# Altium PCB STM32.PcbDoc
Units mm, origin at the board's own origin, x right, y up, seen from the top; angles counter-clockwise.
Board outline 37.5 x 37.5 mm, 2 copper layers (Top Layer, Bottom Layer); 45 components, 54 nets, 176 pads, 63 vias.
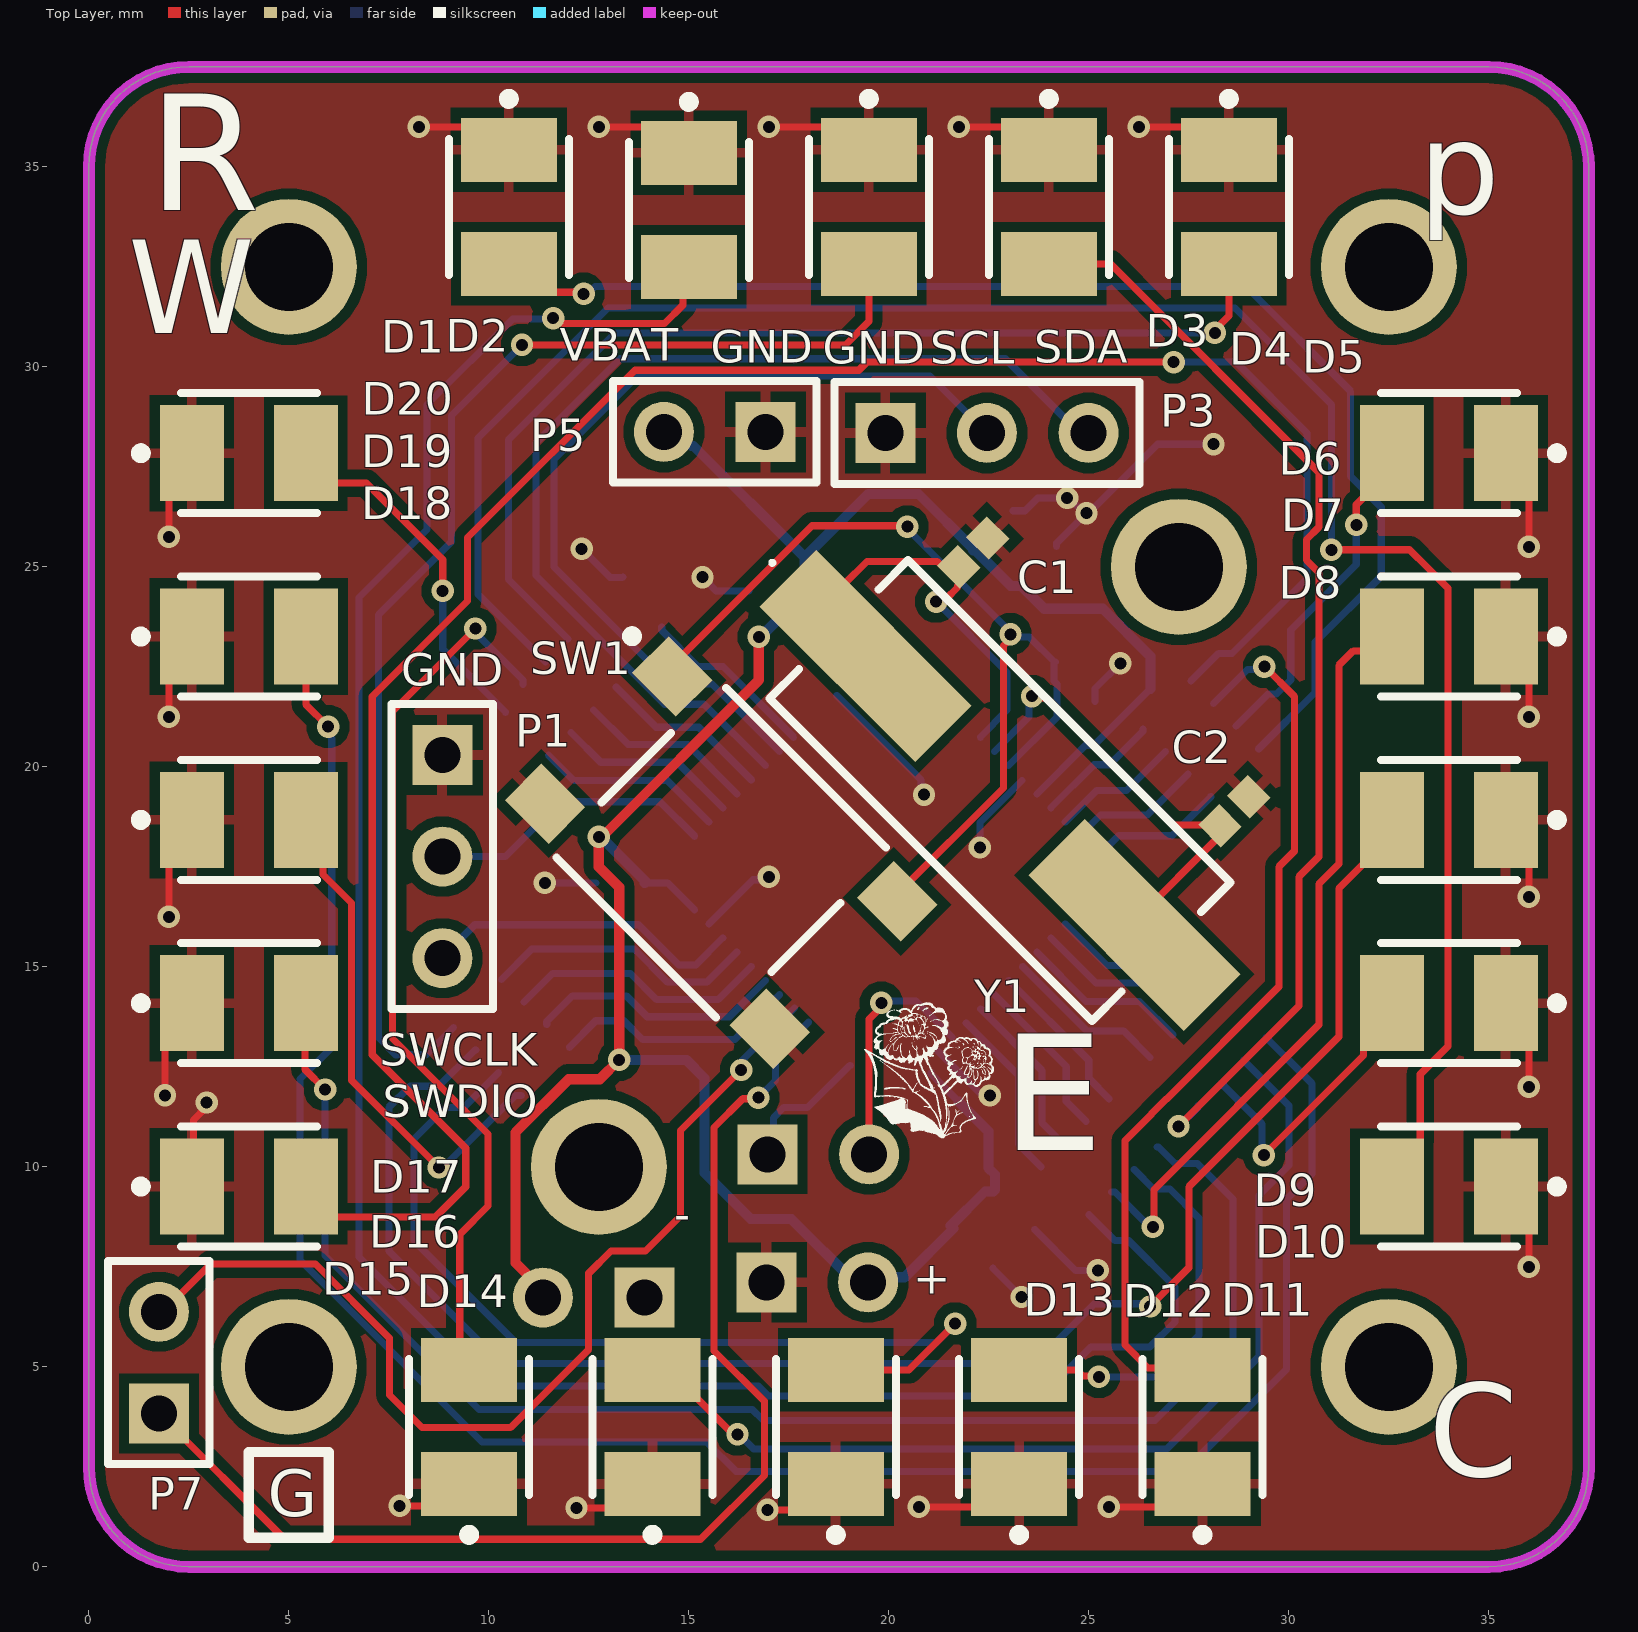
[diagram p0: Top Layer view]
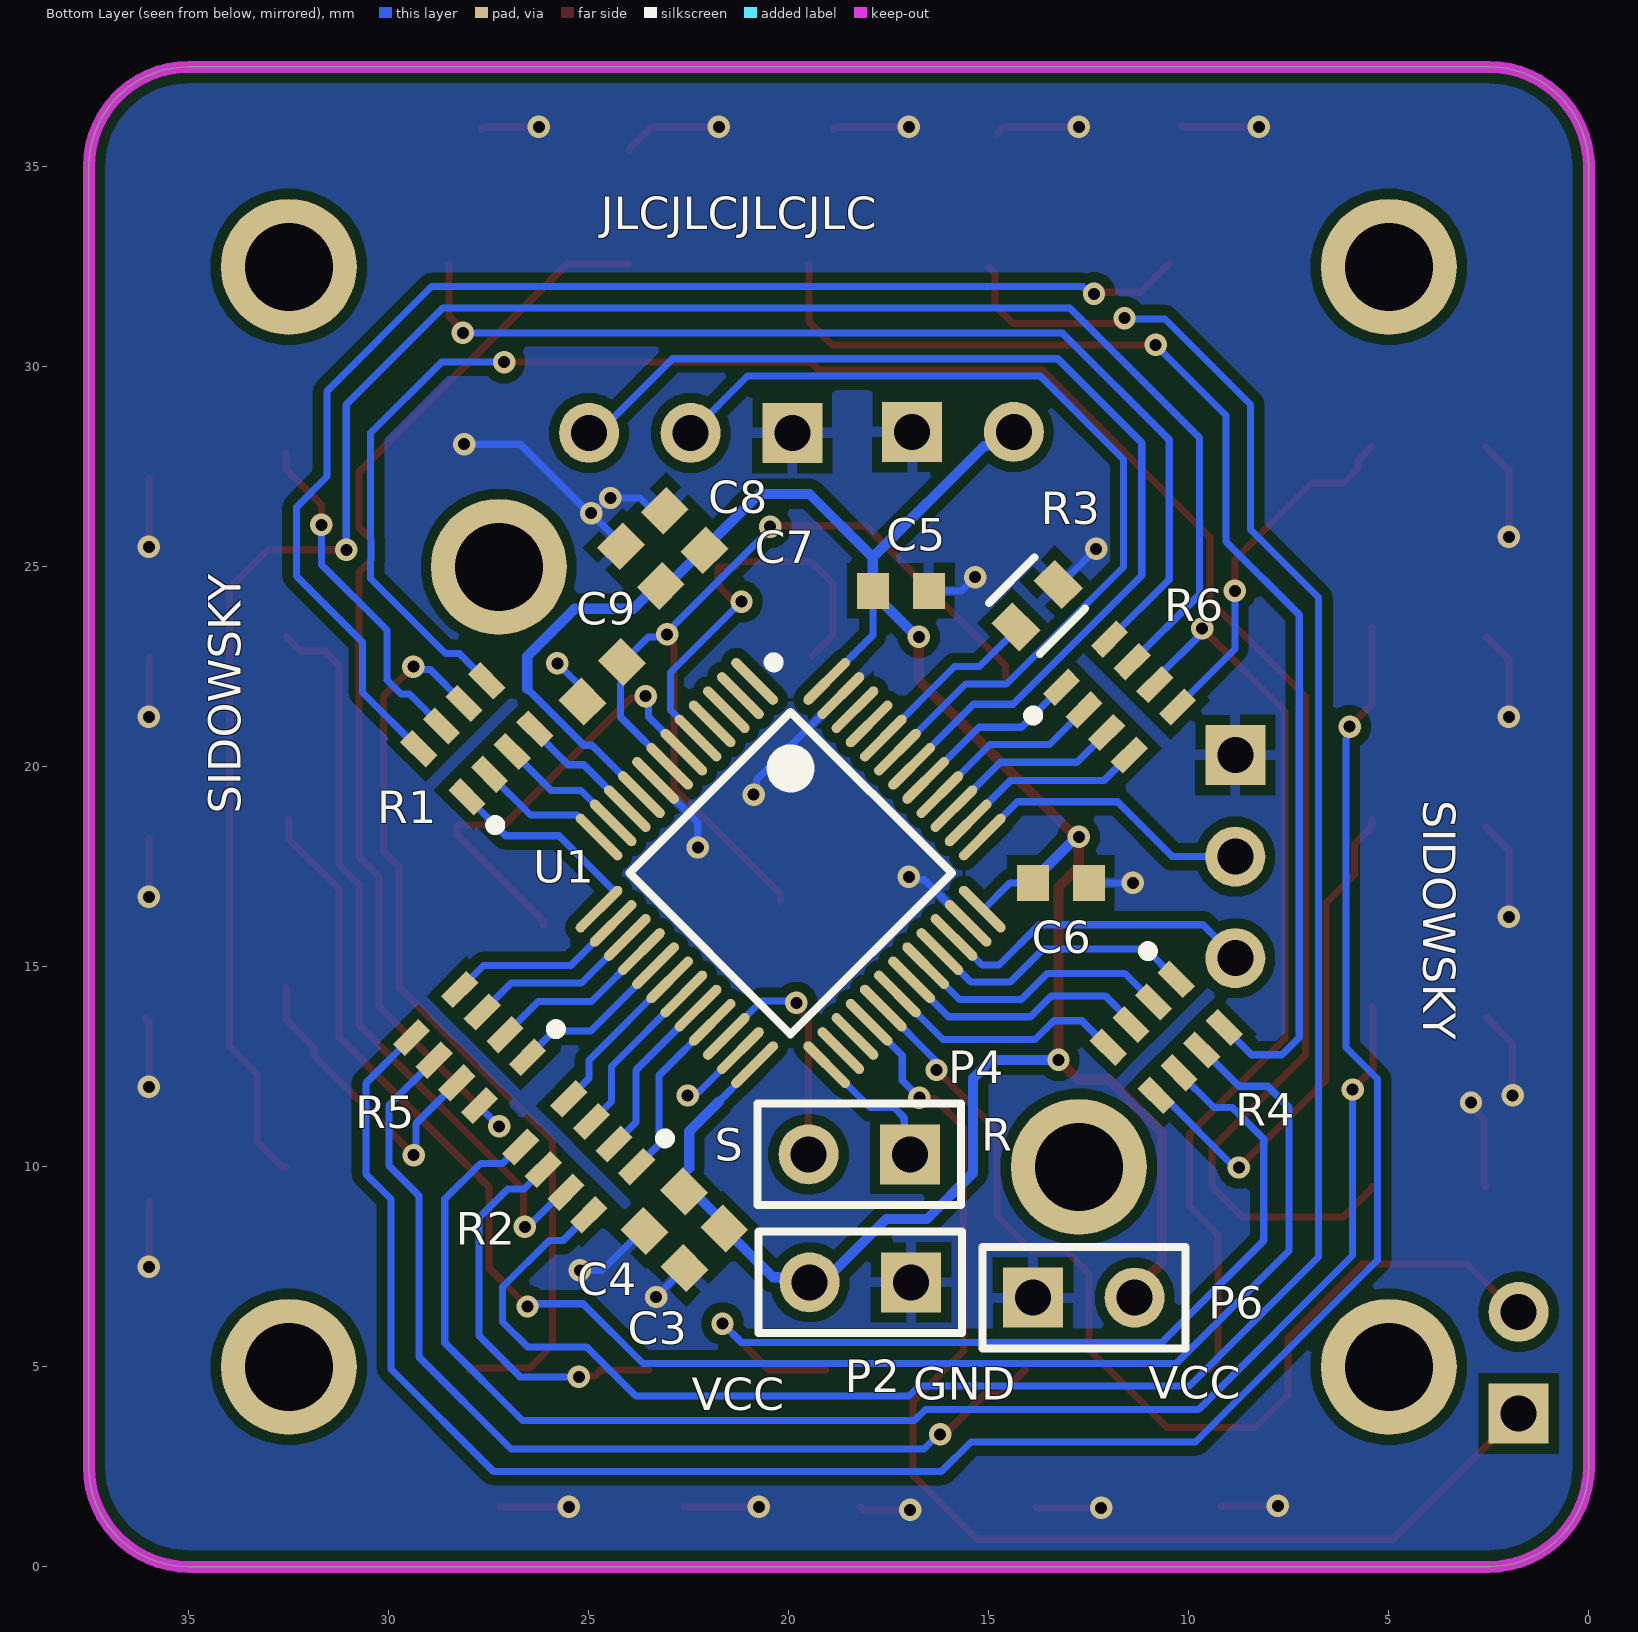
[diagram p1: Bottom Layer view, seen from below]
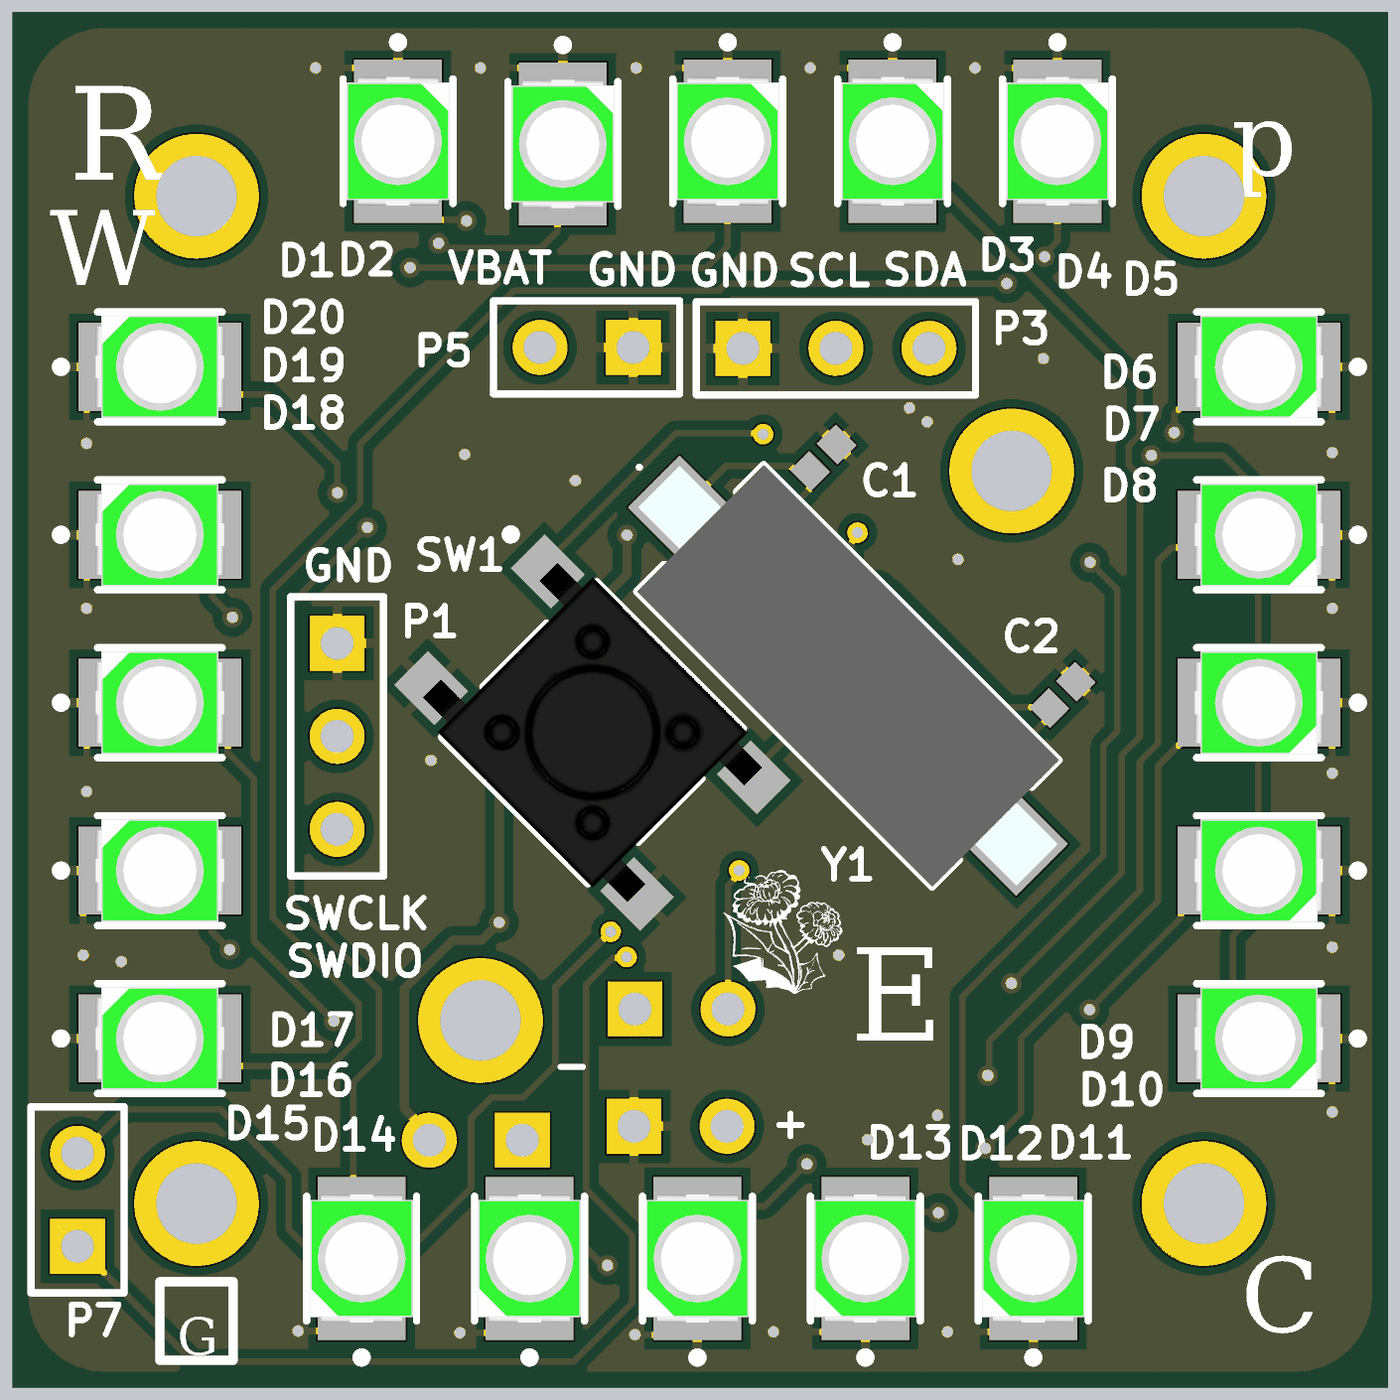
[diagram p2: 3D render of the assembled board from above, using the file's embedded part models]

## Layer stack, top to bottom
Top Solder: solder mask 0.0102, Solder Resist, Dk 3.5
Top Layer: signal copper 0.0356
Dielectric 1: dielectric 0.32, FR-4, Dk 4.8
Bottom Layer: signal copper 0.0356
Bottom Solder: solder mask 0.0102, Solder Resist, Dk 3.5

## Board outline
2.5,0 cw(c2.5,2.5) 0,2.5 0,35 cw(c2.5,35) 2.5,37.5 35,37.5 cw(c35,35) 37.5,35 37.5,2.498 37.5,2.5 cw(c35,2.5) 35,0

## Design rules (kind name [scope] priority, off if disabled: settings)
AcuteAngle [All] p1: minimum=5.80000000000000E+0001 checktracksonly=FALSE
BoardOutlineClearance [All] p1: gap=0.3 ignorepadtopadclearanceinfootprint=FALSE
Clearance [All] p1: gap=0.254 ignorepadtopadclearanceinfootprint=TRUE except(0: Arc-Hole Track-Hole SMDPad-Hole THPad-Hole Via-Hole Fill-Hole Poly-Hole Region-Hole Text-Hole)
Height [All] p1: minheight=0 maxheight=25 prefheight=12.7
HoleToHoleClearance [All] p1: gap=0.254 allowstackedmicrovias=FALSE
MaximumViaCount [All] p1: limit=1000
MinimumAnnularRing [All] p1: minimumring=0.13
MinimumSolderMaskSliver [All] p1: minsoldermaskwidth=0.038
PlaneConnect [All] p1: planeconnectstyle=Direct reliefexpansion=0.508 reliefentries=4 reliefconductorwidth=0.254 reliefairgap=0.254
PolygonConnect [All] p1: thpad.connectstyle=Relief thpad.reliefconductorwidth=0.254 thpad.reliefentries=4 thpad.polygonreliefangle="90 Angle" thpad.airgapwidth=0.254 smdpad.connectstyle=Relief smdpad.reliefconductorwidth=0.254 smdpad.reliefentries=4 smdpad.polygonreliefangle="90 Angle" smdpad.airgapwidth=0.254 via.connectstyle=Direct via.reliefconductorwidth=0.254 via.reliefentries=4 via.polygonreliefangle="90 Angle" via.airgapwidth=0.254
RoutingVias [All] p1: holewidth=0.3 width=0.56 viastyle="Through Hole" minholewidth=0.3 minwidth=0.56 maxholewidth=2.5 maxwidth=2.76
SilkToSilkClearance [All] p1: silktosilkclearance=0.15
SilkToSolderMaskClearance [IsPad] p1: minsilkscreentomaskgap=0.15 clearancetoexposedcopper=TRUE
SolderMaskExpansion [All] p1: expansion=0.05 istentingtop=FALSE useseparateexpansions=TRUE expansionbottom=0.05 istentingbottom=FALSE
UnRoutedNet [All] p1: checkbadconnections=TRUE
Width [All] p1: maxlimit=0.254 minlimit=0.127 preferedwidth=0.2
23 further rules are at their usual default settings.

## Components (designator, comment, footprint, x,y, rotation, side; value= is the part's Value field where it differs from the comment)
C1 "10p 0402" CAPC1006X50X20ML10T10 22.111,25.361 r225 top
C2 "10p 0402" CAPC1006X50X20ML10T10 28.639,18.889 r225 top
C3 "100n" 1608[0603] 22.11,7.963 r135 bottom
C4 "100n" 1608[0603] 23.114,8.89 r135 bottom
C5 "100n" 1608[0603] 17.2,24.4 r0 bottom
C6 "100n" 1608[0603] 13.2,17.1 r0 bottom
C7 "100n" 1608[0603] 23.698,25.019 r225 bottom
C8 "100n" 1608[0603] 22.606,25.908 r225 bottom
C9 "100n" 1608[0603] 24.663,22.123 r135 bottom
D1 "150141BS73100" WL-SMTW_3528 10.5,34 r270 top
D2 "150141BS73100" WL-SMTW_3528 15,33.925 r270 top
D3 "150141BS73100" WL-SMTW_3528 19.5,34 r270 top
D4 "150141BS73100" WL-SMTW_3528 24,34 r270 top
D5 "150141BS73100" WL-SMTW_3528 28.5,34 r270 top
D6 "150141BS73100" WL-SMTW_3528 34,27.84 r180 top
D7 "150141BS73100" WL-SMTW_3528 34,23.257 r180 top
D8 "150141BS73100" WL-SMTW_3528 34,18.673 r180 top
D9 "150141BS73100" WL-SMTW_3528 34,14.09 r180 top
D10 "150141BS73100" WL-SMTW_3528 34,9.507 r180 top
D11 "150141BS73100" WL-SMTW_3528 27.84,3.5 r90 top
D12 "150141BS73100" WL-SMTW_3528 23.257,3.5 r90 top
D13 "150141BS73100" WL-SMTW_3528 18.673,3.5 r90 top
D14 "150141BS73100" WL-SMTW_3528 14.09,3.5 r90 top
D15 "150141BS73100" WL-SMTW_3528 9.507,3.5 r90 top
D16 "150141BS73100" WL-SMTW_3528 4,9.507 r0 top
D17 "150141BS73100" WL-SMTW_3528 4,14.09 r0 top
D18 "150141BS73100" WL-SMTW_3528 4,18.673 r0 top
D19 "150141BS73100" WL-SMTW_3528 4,23.257 r0 top
D20 "150141BS73100" WL-SMTW_3528 4,27.84 r0 top
P1 "Programing" HDR1X3 8.839,20.295 r270 top
P2 "Power" HDR1X2 16.942,7.112 r0 bottom
P3 "I2C" HDR1X3 19.914,28.346 r0 top
P4 "SYN/RDY" HDR1X2 16.967,10.312 r0 bottom
P5 "Power" HDR1X2 16.916,28.372 r180 top
P6 "Power" HDR1X2 13.894,6.731 r180 bottom
P7 "BQ" HDR1X2 1.753,3.835 r90 top
R1 "120R1206" BOUR-CAY16-J4_V 27.8,20.7 r45 bottom
R2 "33R 3.3V diody" BOUR-CAY16-J4_V 25.253,10.25 r315 bottom
R3 "10k" FP-CRCW0603-e3-MFG 13.792,24.028 r135 bottom
R4 "47R" BOUR-CAY16-J4_V 10.564,13.237 r225 bottom
R5 "68R" BOUR-CAY16-J4_V 27.982,12.984 r315 bottom
R6 "100R" BOUR-CAY16-J4_V 11.735,21.742 r135 bottom
SW1 "PTS645SM43SMTR92LFS" FP-PTS645SM43SMTR92LFS-MFG 15.806,17.856 r315 top
U1 "STM32F103C6T6A" STM-LQFP48_L 19.955,17.344 r225 bottom
Y1 "LF_XTAL003166" LFXTAL003166 22.78,19.408 r315 top

## Footprints (in the part's own frame and the unit in brackets; to place one, negate y for a bottom-side part, rotate by r counter-clockwise, add the part's x,y. Pads: shape width x height; smd on the part's side, far side on the other; paste and mask are expansions set on the pad)
1608[0603] [mm] "Chip Capacitor, Body 1.6x0.8mm, IPC High Density"
  rect 0.8x0.9 smd: 1(-0.7,0) 2(0.7,0)
  body extent -0.87,-0.48 0.87,0.47, height 1.3
BOUR-CAY16-J4_V [mm] "SMD, 8-Leads, Body 1.6x3.2mm, Pitch 0.8mm"
  rect 0.9x0.425 smd: 1(-0.85,1.2) 2(-0.85,0.4) 3(-0.85,-0.4) 4(-0.85,-1.2) 5(0.85,-1.2) 6(0.85,-0.4) 7(0.85,0.4) 8(0.85,1.2)
  silkscreen extent -1.97,1.08 -1.73,1.32, body extent -0.8,-1.6 0.8,1.6, height 0.6
CAPC1006X50X20ML10T10 [mm] "Chip Capacitor, 2-Leads, Body 1.00x0.55mm, IPC Low Density"
  rect 0.74x0.8 smd: 1(-0.51,0) 2(0.51,0)
  body extent -0.55,-0.33 0.55,0.32, height 0.5
FP-CRCW0603-e3-MFG [mm]
  rect 0.75x1 smd paste+0 mask+0: 1(-0.75,0) 2(0.75,0)
  silkscreen extent -0.8,-0.9 0.8,0.9, body extent -0.77,-0.42 0.77,0.42, height 0.5
FP-PTS645SM43SMTR92LFS-MFG [mm]
  rect 1.55x1.3 smd paste+0 mask+0: 1(-3.975,2.25) 2(3.975,2.25) 3(-3.975,-2.25) 4(3.975,-2.25)
  silkscreen extent -5.52,-3 3,3, body extent -4.85,-3.1 4.85,3.1, height 0.25
HDR1X2 [mm] "Connector; Header; 2 Position"
  rect 1.5x1.5 hole 0.9: 1(0,0)
  round 1.5 hole 0.9: 2(2.54,0)
  silkscreen extent -1.27,-1.27 3.81,1.27
HDR1X3 [mm]
  rect 1.5x1.5 hole 0.9: 1(0,0)
  round 1.5 hole 0.9: 2(2.54,0) 3(5.08,0)
  silkscreen extent -1.27,-1.27 6.35,1.27
LFXTAL003166 [mm]
  rect 5.5x2 smd: 1(-4.75,0) 2(4.75,0)
  silkscreen extent -8.1,-2.45 5.7,2.45, body extent -7.3,-2.45 7.3,2.45, height 4.4
STM-LQFP48_L [mm] "QFP, 48-Leads, Body 7x7mm, Pitch 0.5mm, IPC High Density"
  oval 1.55x0.25 smd: 1(-4.025,2.75) 2(-4.025,2.25) 3(-4.025,1.75) 4(-4.025,1.25) 5(-4.025,0.75) 6(-4.025,0.25) 7(-4.025,-0.25) 8(-4.025,-0.75) 9(-4.025,-1.25) 10(-4.025,-1.75) 11(-4.025,-2.25) 12(-4.025,-2.75) 25(4.025,-2.75) 26(4.025,-2.25) 27(4.025,-1.75) 28(4.025,-1.25) 29(4.025,-0.75) 30(4.025,-0.25) 31(4.025,0.25) 32(4.025,0.75) 33(4.025,1.25) 34(4.025,1.75) 35(4.025,2.25) 36(4.025,2.75)
  oval 0.25x1.55 smd: 13(-2.75,-4.025) 14(-2.25,-4.025) 15(-1.75,-4.025) 16(-1.25,-4.025) 17(-0.75,-4.025) 18(-0.25,-4.025) 19(0.25,-4.025) 20(0.75,-4.025) 21(1.25,-4.025) 22(1.75,-4.025) 23(2.25,-4.025) 24(2.75,-4.025) 37(2.75,4.025) 38(2.25,4.025) 39(1.75,4.025) 40(1.25,4.025) 41(0.75,4.025) 42(0.25,4.025) 43(-0.25,4.025) 44(-0.75,4.025) 45(-1.25,4.025) 46(-1.75,4.025) 47(-2.25,4.025) 48(-2.75,4.025)
  silkscreen extent -4.15,-2.85 2.85,3.55, body extent -3.5,-3.5 3.5,3.5, height 1.6
WL-SMTW_3528 [mm] "SMD Mono-color TOP LED, body 3.2x2.8mm"
  rect 1.6x2.4 smd: 1(-1.425,0) 2(1.425,0)
  silkscreen extent -2.82,-1.5 1.7,1.5, body extent -1.75,-1.4 1.75,1.4, height 1.9

## Part data
C1 C2: library part CMP-2008-04829-1, Manufacturer="AVX Interconnect / Elco", Part Number=0402YJ100FBSTR
C3 C4 C5 C6 C7 C8 C9: library part "Cap Semi", "Capacitor (Semiconductor SIM Model)", LatestRevisionDate=29-May-2009, LatestRevisionNote="IPC-7351 Footprint Added.", PackageDescription="Chip Capacitor", PackageReference=C1206, Published=8-Jun-2000, Publisher="Altium Limited"
D1 D2 D3 D4 D5 D6 D7 D8 D9 D10 D11 D12 D13 D14 D15 D16 D17 D18 D19 D20: library part CMP-1429-00005-2, Case Code (Imperial)=1411, Case Code (Metric)=3528, Color=Blue, Forward Current=100mA, Forward Voltage=3.2V, Max Operating Temperature=85°C, Max Reverse Voltage (DC)=5V, Min Operating Temperature=-40°C, Test Current=20mA, Case/Package=3528, Dominant Wavelength=470nm, Height=1.9mm, Length=3.5mm, Lens Style="Clear, Round", Luminous Intensity=270mcd, Mount="Surface Mount", NexarPartId=29717793, Packaging="Tape and Reel", Peak Wavelength=465nm, REACH SVHC=Unknown, RoHS=Compliant, Viewing Angle=120°, Wavelength=470nm, Width=2.8mm
P1 P3: library part "Header 3", "Header, 3-Pin", LatestRevisionDate=17-Jul-2002, LatestRevisionNote="Re-released for DXP Platform.", Publisher="Altium Limited"
P2 P4 P5 P6 P7: library part "Header 2", "Header, 2-Pin", LatestRevisionDate=17-Jul-2002, LatestRevisionNote="Re-released for DXP Platform.", Publisher="Altium Limited"
R1 R2 R4 R5 R6: library part CMP-1747-00007-1, "Chip Resistor Array, 1 KOhm, +/- 5%, 62.5 mW, -55 to 125 degC, 8-Pin SMD, RoHS, Tape and Reel", Case Code (Imperial)=0603, Case Code (Metric)=1608, Max Operating Temperature="155 degC", Min Operating Temperature="-55 degC", Package Quantity=5000, Power Rating="100 mW", Resistance="330 Ohm", Tolerance=1%, Voltage Rating="50 V", Case\Package=0603, ComponentLink1Description="Manufacturer URL", ComponentLink1URL=http://www.bourns.com/, ComponentLink2Description=Datasheet, ComponentLink2URL=http://www.bourns.com/pdfs/CATCAY.pdf, DatasheetVersion=Sep-14, Height="0.45 mm", Length="1.6 mm", Mount="Surface Mount", PackageDescription="8-Pin Surface Mount Device, Body 1.6 x 3.2 mm, Pitch 0.8 mm", PackageReference=CAY16-J4, Packaging="Tape and Reel", Pins=2, REACH SVHC="No SVHC", RoHSCompliant=true, Voltage Rating (DC)="50 V", Width="0.8 mm"
R3: library part CMP-2000-03525-2, "RES Thick Film, 10kΩ, 1%, 0.1W, 100ppm/°C, 0603", Case Code (Imperial)=0603, Case Code (Metric)=1608, Max Operating Temperature=155°C, Max Power Dissipation=100mW, Min Operating Temperature=-55°C, Package Quantity=10, Resistance=66.5kR, Temperature Coefficient=100ppm/°C, Tolerance=1%, Voltage Rating=75V, Case/Package=0603, Composition="Thick Film", Contact Plating=Tin, Depth=0.85mm, Features="Automotive AEC-Q200", Height=0.45mm, Length=1.55mm, Military Standard=Not, Number of Pins=2, Number of Terminations=2, Packaging="Tape and Reel", Power Rating=100mW, Radiation Hardening=No, Termination=SMD/SMT, Weight=7.1E-05oz, Width=0.85mm, Working Voltage=75V
SW1: library part CMP-2000-05160-2, "SWITCH TACTILE SPST-NO 0.05A 12V", Case/Package=SMD/SMT, Color=Black, Contact Resistance=100mR, Current Rating=50mA, Max Operating Temperature=60°C, Max Voltage Rating (DC)=12V, Min Operating Temperature=-20°C, Operating Force=160gf, Package Quantity=1, Actuator Length=0.85mm, Actuator Material=Nylon, Actuator Type=Standard, Contact Material=Silver, Contact Plating=Silver, Depth=9mm, Illumination Type=Non-Illuminated, Lead Free="Lead Free", Length=6mm, Max Current Rating=50mA, Mechanical Life=100000Cycles, Mount="Surface Mount", Orientation=Straight, Packaging="Tape and Reel", REACH SVHC="No SVHC", Switch Function=Off-Mom, Termination="Gull Wing", Throw Configuration=SPST, Voltage Rating (DC)=12V
U1: library part CMP-0237-00254-3, "ARM Cortex-M3 32-bit MCU, 32 KB Flash, 10 KB Internal RAM, 37 I/Os, 48-pin LQFP, -40 to 85 degC, Tray", I/Os (High Current)=37, Operating Frequency(F) (Processor speed) (MHz)=72, Supply Voltage(Vcc) min (V)=2, A/D Converter="2x12-bit (10 Channel)", ComponentLink1Description="Manufacturer URL", ComponentLink1URL=http://www.st.com/web/en/home.html, ComponentLink2Description=Datasheet, ComponentLink2URL=http://www.st.com/st-web-ui/static/active/en/resource/technical/document/datasheet/CD00210843.pdf, ComponentLink3Description="Package Specification", ComponentLink3URL=http://www.st.com/st-web-ui/static/active/en/resource/technical/document/datasheet/DM00058181.pdf, Core="ARM Cortex-M3", DatasheetVersion="Rev. 6", FLASH Size (Prog) (kB)=32, Internal RAM Size (kB)=10, Mounting Technology="Surface Mount", PackageDescription="48-Pin Low Profile Quad Flat Package, 7 x 7 mm Body, 0.5 mm Pitch", PackageReference=LQFP48, PackageVersion="Rev. 6, 06/2013", Packing=Tray, PartNumber=STM32F103C6T6A
Y1: "Crystal or Oscillator", Manufacturer_Name=IQD, Manufacturer_Part_Number="LF XTAL003166", Datasheet Link=https://www.tme.eu/Document/8dce48f98215dcf997cc1ef25822beeb/LFXTAL003166.pdf, Height=4.3mm

## Free pads (board coordinates)
  round 3.4 hole 2.2: 0(5,5) 0(5,32.5) 0(12.75,10) 0(27.25,25) 0(32.5,5) 0(32.5,32.5)

## Via types
v1: diameter 0.56, hole 0.3, Top Layer to Bottom Layer, tented both sides, 58 vias
v2: diameter 0.56, hole 0.3, Top Layer to Bottom Layer, 5 vias

## Nets (pads, with @x,y where several pads share a name; then routed paths per layer and width w, separated by ;. In a path a pad name is that pad's centre, name@x,y a point inside that pad or via, vN(x,y) a via of type N, cw(c..) or ccw(c..) an arc to the next point about the centre after c; other vN are vias at no path point)
D1: R1.1 U1.13 | length 5.3
  Bottom Layer w0.178: U1.13@24.763,16.424 24.367,16.82 24.367,16.9 25.744,18.277 27.077,18.277 28.047,19.247 R1.1
D1N: D1.2 R1.8 | length 33
  Top Layer w0.178: D1.2 11.211,31.864 12.332,31.864 v1(12.37,31.826)
  Bottom Layer w0.178: v1(12.37,31.826) 12.473,31.826 12.651,32.004 12.863,32.004 28.931,32.004 31.547,29.388 31.547,27.254 32.31,26.491 32.31,24.766 30.658,23.114 30.658,21.861 R1.8
D2: R2.1 U1.21 | length 4.4
  Bottom Layer w0.178: U1.21@21.934,13.596 23.241,12.29 23.241,10.565 R2.1
D2N: D2.2 R2.8 | length 56.9
  Top Layer w0.178: v1(11.608,31.217) 11.711,31.217 11.845,31.083 14.395,31.083 14.85,31.537 14.85,32.35 D2.2
  Bottom Layer w0.178: v1(11.608,31.217) 11.589,31.198 10.598,31.198 8.458,29.058 8.458,25.933 6.756,24.232 6.756,7.747 9.982,4.521 16.739,4.521 16.993,4.267 23.825,4.267 25.058,5.5 26.531,5.5 27.155,6.124 27.155,6.997 25.998,8.153 25.652,8.153 R2.8
D3: R4.1 U1.33 | length 6.9
  Bottom Layer w0.178: R4.1 11.072,15.443 13.64,15.443 14.467,14.616 15.449,14.616 16.197,15.364 U1.33@16.207,15.364
D3N: D3.2 R4.8 | length 31.5
  Top Layer w0.178: v1(10.829,30.548) 18.914,30.548 19.5,31.133 D3.2
  Bottom Layer w0.178: R4.8 8.431,12.802 7.671,12.802 7.239,13.233 7.239,23.8 9.068,25.629 9.068,28.786 v1(10.829,30.548)
D4: R5.1 U1.17 | length 4.1
  Bottom Layer w0.178: U1.17@23.349,15.01 23.349,15 24.949,13.4 25.869,13.4 R5.1
D4N: D4.2 R5.8 | length 27.7
  Top Layer w0.178: D4.2 25.54,32.575 30.75,27.365 30.75,25.991 30.441,25.682 30.441,25.166 30.75,24.857 30.75,17.75 30.25,17.25 30.25,14.019 v1(27.243,11.013)
  Bottom Layer w0.178: v1(27.243,11.013) 27.734,11.504 R5.8
D5: R6.1 U1.41 | length 4.3
  Bottom Layer w0.178: R6.1 14.186,20.988 15.249,20.988 U1.41@16.56,19.677
D5N: D5.2 R6.8 | length 26.2
  Top Layer w0.178: v1(28.148,30.848) 28.148,30.918 28.5,31.269 D5.2
  Bottom Layer w0.178: R6.8 10.49,24.684 10.49,28.176 13.162,30.848 v1(28.148,30.848)
D6: R1.2 U1.12 | length 3.4
  Bottom Layer w0.178: U1.12@24.763,18.263 25.296,18.796 26.462,18.796 R1.2
D6N: D6.2 R1.7 | length 8.6
  Top Layer w0.178: v1(31.687,26.048) 31.686,26.049 31.686,26.551 32.575,27.44 D6.2
  Bottom Layer w0.178: R1.7 29.484,21.819 29.693,21.819 30.048,22.174 30.048,23.419 31.687,25.058 v1(31.687,26.048)
D7: R2.2 U1.20 | length 4.2
  Bottom Layer w0.178: U1.20@22.288,13.95 23.825,12.412 23.825,11.112 R2.2
D7N: D7.2 R2.7 | length 19
  Top Layer w0.178: v1(26.6,8.5) 26.634,8.534 26.634,9.435 30.75,13.551 30.75,17.069 31.25,17.569 31.25,22.538 31.612,22.9 32.219,22.9 D7.2
  Bottom Layer w0.178: R2.7 25.652,9.367 26.519,8.5 v1(26.6,8.5)
D8: R4.2 U1.32 | length 6.6
  Bottom Layer w0.178: R4.2 11.594,14.834 13.538,14.834 14.188,14.184 15.734,14.184 U1.32@16.56,15.01
D8N: D8.2 R4.7 | length 41.9
  Top Layer w0.178: v1(26.532,6.508) 27.5,7.477 27.5,9.5 31.25,13.25 31.25,16.958 31.854,17.562 31.864,17.562 32.5,18.198 D8.2@32.5,18.7
  Bottom Layer w0.178: R4.7 9.651,12.919 8.746,12.014 8.026,12.014 7.5,11.488 7.5,7.892 10.312,5.08 23.647,5.08 25.145,6.578 26.462,6.578 v1(26.532,6.508)
D9: R5.2 U1.16 | length 4.2
  Bottom Layer w0.178: U1.16@23.702,15.364 24.932,14.134 26.266,14.134 R5.2
D9N: D9.2 R5.7 | length 7.8
  Top Layer w0.178: v1(29.377,10.294) 31.864,12.78 31.864,12.979 32.575,13.69 D9.2@32.575,14.5
  Bottom Layer w0.178: R5.7 29.325,11.075 29.325,10.346 v1(29.377,10.294)
D10: R6.2 U1.40 | length 4.5
  Bottom Layer w0.178: R6.2 13.486,20.557 14.974,20.557 U1.40@16.207,19.324
D10N: D10.2 R6.7 | length 52
  Top Layer w0.178: v1(31.064,25.424) 31.066,25.425 33.02,25.425 33.477,24.968 33.982,24.463 33.982,13.013 33.286,12.316 33.286,10.618 32.668,10 D10.2@32.575,10
  Bottom Layer w0.178: R6.7 9.728,24.315 9.728,28.222 12.977,31.471 28.651,31.471 31.064,29.058 v1(31.064,25.424)
D11: R1.3 U1.11 | length 3.2
  Bottom Layer w0.178: U1.11@24.409,18.616 25.198,19.406 25.94,19.406 R1.3
D11N: D11.2 R1.6 | length 23
  Top Layer w0.178: D11.2@28,4.925 27.952,4.973 26.478,4.973 25.909,5.542 25.909,10.659 26.564,11.314 26.564,11.326 26.929,11.691 26.941,11.691 29.75,14.5 29.75,17.5 30.137,17.887 30.137,21.763 29.396,22.504 v1(29.388,22.504)
  Bottom Layer w0.178: R1.6 28.966,22.431 29.315,22.431 v1(29.388,22.504)
D12: R2.3 U1.19 | length 4.1
  Bottom Layer w0.178: U1.19@22.642,14.303 24.435,12.51 24.435,11.634 R2.3
D12N: D12.2 R2.6 | length 9.8
  Top Layer w0.178: D12.2@23.5,4.925 24.691,4.925 24.849,4.767 25.233,4.767 v1(25.25,4.75)
  Bottom Layer w0.178: v1(25.25,4.75) 26.721,4.75 27.75,5.779 27.75,8.724 27.026,9.449 26.62,9.449 R2.6
D13: R4.3 U1.31 | length 6.4
  Bottom Layer w0.178: R4.3 11.447,13.632 12.09,14.275 13.437,14.275 13.959,13.752 16.01,13.752 U1.31@16.914,14.657
D13N: D13.2 R4.6 | length 23.2
  Top Layer w0.178: D13.2@19.073,4.925 20.503,4.925 v1(21.659,6.081)
  Bottom Layer w0.178: R4.6 9.373,11.481 8.915,11.481 8.128,10.693 8.128,8.153 10.669,5.613 21.19,5.613 v1(21.659,6.081)
D14: R5.3 U1.15 | length 4.4
  Bottom Layer w0.178: U1.15@24.056,15.717 25.179,14.594 26.937,14.594 R5.3
D14N: D14.2 R5.6 | length 25.1
  Top Layer w0.178: D14.2 14.715,4.301 15.115,4.301 16.028,3.387 16.144,3.387 v1(16.217,3.314)
  Bottom Layer w0.178: v1(16.217,3.314) 16.255,3.314 16.622,2.946 26.946,2.946 29.25,5.25 29.25,9.286 30,10.036 30,11.531 R5.6
D15: R6.3 U1.39 | length 4.6
  Bottom Layer w0.178: R6.3 12.799,20.113 14.71,20.113 U1.39@15.853,18.97
D15N: D15.2 R6.6 | length 22.7
  Top Layer w0.178: D15.2 9.274,5.157 9.274,8.309 9.982,9.017 9.982,10.82 7.595,13.208 7.595,21.387 v1(9.665,23.457)
  Bottom Layer w0.178: v1(9.665,23.457) 9.665,23.353 10.851,22.167 R6.6
D16: R1.4 U1.10 | length 3.2
  Bottom Layer w0.178: U1.10@24.056,18.97 24.056,18.98 25.128,20.052 25.518,20.052 26.35,20.884 R1.4
D16N: D16.2 R1.5 | length 54
  Top Layer w0.178: D16.2 5.425,9.461 6.136,8.75 8.674,8.75 9.423,9.5 9.423,10.465 7.087,12.802 7.087,21.76 9.47,24.143 9.47,25.73 13.656,29.916 19.248,29.916 19.448,30.116 v1(27.119,30.116)
  Bottom Layer w0.178: v1(27.119,30.116) 28.685,30.116 30.455,28.346 30.455,25.695 30.441,25.682 30.441,25.166 30.455,25.153 30.455,24.706 28.583,22.835 28.238,22.835 R1.5
D17: R2.4 U1.18 | length 4
  Bottom Layer w0.178: U1.18@22.995,14.657 23.005,14.657 24.998,12.664 24.998,12.213 25.5,11.711 R2.4
D17N: D17.2 R2.5 | length 37.7
  Top Layer w0.178: D17.2@5.425,14 5.4,13.975 5.4,12.44 v1(5.906,11.934)
  Bottom Layer w0.178: v1(5.906,11.934) 5.906,7.785 9.754,3.937 16.586,3.937 16.866,3.658 26.658,3.658 28.6,5.6 28.6,9.195 27.711,10.084 27.154,10.084 26.74,10.498 R2.5
D18: R4.4 U1.30 | length 6.2
  Bottom Layer w0.178: R4.4 12.675,13.651 13.373,13.651 13.842,13.183 16.147,13.183 U1.30@17.268,14.303
D18N: D18.2 R4.5 | length 12.9
  Top Layer w0.178: D18.2 5.425,18.5 5.854,18.071 5.854,17.311 6.568,16.597 6.568,12.165 v1(8.751,9.982)
  Bottom Layer w0.178: v1(8.751,9.982) 8.854,9.982 10.66,11.788 R4.5
D19: R5.4 U1.14 | length 4.5
  Bottom Layer w0.178: U1.14@24.409,16.071 25.451,15.029 27.633,15.029 R5.4
D19N: D19.2 R5.5 | length 53.4
  Top Layer w0.178: D19.2@5.425,23.5 5.425,21.562 v1(5.981,21.006)
  Bottom Layer w0.178: v1(5.981,21.006) 6.054,20.933 6.054,20.728 6.072,20.711 6.072,12.981 5.283,12.192 5.283,7.671 9.83,3.124 15.443,3.124 16.18,2.388 27.388,2.388 29.947,4.947 29.947,9.195 30.575,9.823 30.575,12.088 R5.5
D20: R6.4 U1.38 | length 4.7
  Bottom Layer w0.178: R6.4 12.127,19.653 14.463,19.653 U1.38@15.5,18.616
D20N: D20.2 R6.5 | length 9.2
  Top Layer w0.178: D20.2@5.425,28 5.772,27.653 5.772,27.456 6.136,27.093 6.936,27.093 8.847,25.182 v1(8.847,24.401)
  Bottom Layer w0.178: v1(8.847,24.401) 8.847,22.943 10.42,21.371 R6.5@10.42,21.361
GND: C1.1 C2.1 C3.1 C4.1 C5.1 C6.1 C7.1 C8.1 C9.1 D1.1 D2.1 D3.1 D4.1 D5.1 D6.1 D7.1 D8.1 D9.1 D10.1 D11.1 D12.1 D13.1 D14.1 D15.1 D16.1 D17.1 D18.1 D19.1 D20.1 P1.1 P2.1 P3.1 P5.1 P6.1 R3.2 SW1.3 SW1.4 U1.8 U1.23 U1.35 U1.47 | length 62.2
  Top Layer w0.178: v1(1.905,11.786) 1.905,13.08 D17.1@2.575,13.75 ; v1(2,16.25) 2,17.925 D18.1@2.575,18.5 ; v1(2,21.25) 2,22.675 D19.1@2.575,23.25 ; v1(2,25.75) 2,27.425 D20.1@2.575,28 ; D16.1 2.616,9.548 2.616,11.174 2.946,11.504 v1(2.946,11.608) ; v1(7.772,1.524) D15.1@9.201,1.524 ; v1(8.25,36) 10.153,36 D1.1@10.189,36.036 ; v1(12.192,1.473) 13.798,1.473 D14.1@13.825,1.5 ; v1(12.75,36) 14.625,36 D2.1@14.789,35.836 ; v1(16.967,1.422) 18.147,1.422 D13.1@18.225,1.5 ; v1(17,36) 18.825,36 D3.1@18.889,35.936 ; v1(20.75,1.5) D12.1@22.625,1.5 ; v1(21.75,36) 23.425,36 D4.1 ; v1(25.5,1.5) D11.1@27.225,1.5 ; v1(26.25,36) 27.625,36 D5.1@27.689,35.936 ; v1(36,7.5) D10.1@36,9.125 ; v1(36,12) 36,13.625 D9.1@36.1,13.725 ; v1(36,16.75) D8.1@36,18.225 ; v1(36,21.25) D7.1@36,22.725 ; v1(36,25.5) D6.1@36,27.225
  Bottom Layer w0.178: v1(11.4,17.1) C6.1@12.68,17.1 ; v1(12.319,25.451) 13.034,24.736 13.34,24.736 R3.2@13.35,24.746 ; v1(15.342,24.74) 15.681,24.4 C5.1 ; U1.35@15.5,16.071 16.606,17.177 16.927,17.177 v1(17,17.25) ; U1.47 20.806,19.675 20.806,19.377 v1(20.879,19.304) ; U1.23@21.227,12.889 22.26,11.856 22.454,11.856 v1(22.528,11.783) ; v1(22.276,17.983) 22.276,18.604 U1.8 ; C3.1 22.605,7.458 v1(23.317,6.746) ; C8.1 23.403,26.403 23.721,26.721 v1(24.46,26.721) 24.511,26.721 24.892,26.34 v1(24.943,26.34) ; C4.1@23.644,8.43 23.648,8.43 24.669,7.409 v1(25.226,7.409) ; C7.1 24.193,25.59 v1(24.943,26.34) ; C9.1 25.158,21.958 v1(25.786,22.586) ; v1(28.116,28.065) 26.715,28.065 24.99,26.34 v1(24.943,26.34)
I2C_SCL: P3.2 U1.43 | length 22.5
  Bottom Layer w0.178: U1.43@17.268,20.384 15.579,22.073 14.556,22.073 11.633,24.995 11.633,27.687 13.715,29.769 21.031,29.769 P3.2
I2C_SDA: P3.3 U1.42 | length 26.5
  Bottom Layer w0.178: U1.42@16.914,20.031 15.38,21.565 14.395,21.565 11.176,24.784 11.176,28.1 13.277,30.201 22.911,30.201 24.822,28.289 24.879,28.346 P3.3
NetC1_2: C1.2 U1.5 Y1.1 | length 10.8
  Top Layer w0.178: Y1.1 18.897,23.292 18.897,24.58 19.453,25.136 21.216,25.136 21.352,25 C1.2 21.771,24.979 21.771,24.581 21.72,24.53 21.72,24.485 21.438,24.203 21.257,24.203 v1(21.184,24.13)
  Bottom Layer w0.178: v1(21.184,24.13) 22.958,22.356 22.958,21.433 22.958,21.418 22.288,20.748 U1.5@22.288,20.738
NetC2_2: C2.2 U1.6 Y1.2 | length 11.2
  Top Layer w0.178: v1(23.581,21.765) 23.629,21.716 23.949,21.716 24.038,21.628 27.116,18.55 28.258,18.55 28.3,18.508 28.3,18.3 26.139,16.139 Y1.2
  Bottom Layer w0.178: U1.6@22.642,20.384 23.508,21.25 23.508,21.692 v1(23.581,21.765)
NetC9_2: C9.2 SW1.1 SW1.2 U1.7 | length 23.8
  Top Layer w0.178: SW1.1 14.587,22.535 18.078,26.027 20.441,26.027 v2(20.465,26.002) ; SW1.2 20.208,16.813 22.867,19.472 22.867,23.037 23.041,23.211 v2(23.041,23.314)
  Bottom Layer w0.178: v2@20.465,25.991 20.465,25.946 23.041,23.371 v2(23.041,23.314) 23.114,23.241 23.52,23.241 24.143,22.618 C9.2 24.133,22.583 24.133,22.143 24.204,22.073 24.204,21.239 U1.7@22.995,20.031
NetR3_1: R3.1 U1.44 | length 4.5
  Bottom Layer w0.178: R3.1 14.323,23.412 15.23,22.504 15.855,22.504 U1.44@17.621,20.738
OTHER: P7.1 U1.28 | length 30.1
  Top Layer w0.178: P7.1 4.9,0.688 15.293,0.688 16.891,2.286 16.891,4.14 15.633,5.398 15.633,10.985 16.35,11.702 16.71,11.702 v2(16.739,11.731)
  Bottom Layer w0.178: v2(16.739,11.731) 17.165,12.157 17.165,12.787 U1.28
PWM: P7.2 U1.29 | length 25.7
  Top Layer w0.178: P7.2 1.855,6.375 3.049,7.569 5.664,7.569 7.518,5.715 7.518,4.293 8.331,3.48 10.546,3.48 12.497,5.43 12.497,7.341 13.056,7.899 13.919,7.899 14.793,8.773 14.793,10.907 v2(16.307,12.421)
  Bottom Layer w0.178: v2(16.307,12.421) 16.307,12.635 U1.29
RDY: P4.1 U1.25 | length 3.4
  Bottom Layer w0.178: P4.1 17.114,10.459 17.114,11.225 17.37,11.481 17.971,11.481 19.025,12.535 U1.25@19.035,12.535
SWCLK: P1.2 U1.37 | length 7.2
  Bottom Layer w0.178: P1.2 10.414,17.755 11.786,19.126 14.283,19.126 U1.37@15.146,18.263
SWDIO: P1.3 U1.34 | length 8.1
  Bottom Layer w0.178: P1.3 8.839,15.245 9.647,16.053 13.741,16.053 14.747,15.048 15.174,15.048 15.843,15.717 U1.34@15.853,15.717
SYN: P4.2 U1.22 | length 6.1
  Top Layer w0.178: P4.2 19.507,13.689 19.812,13.994 v2(19.812,14.097)
  Bottom Layer w0.178: v2(19.812,14.097) 19.857,14.142 20.681,14.142 U1.22@21.581,13.242
VCC: C3.2 C4.2 C5.2 C6.2 C7.2 C8.2 P2.2 P5.2 P6.2 U1.9 U1.24 U1.36 U1.48 | length 66.9
  Top Layer w0.254: P6.2 11.354,6.916 10.669,7.601 10.669,10.862 11.998,12.191 12.775,12.191 v1@13.255,12.671 ; v1(13.259,12.675) 13.259,16.993 12.75,17.501 v1(12.75,18.25) 12.791,18.209 16.75,22.167 v1(16.75,23.25)
  Bottom Layer w0.178: C6.2 14.471,17.1 U1.36@15.146,16.424 ; C5.2 17.9,24.35 17.9,23.287 U1.48@19.035,22.152 ; U1.24@21.06,12.36 21.06,12.317 21.75,11.626 ; U1.9@23.702,19.324 24.917,20.539 25.128,20.539 26.539,21.95
  Bottom Layer w0.254: v1(12.75,18.25) 12.8,18.25 13.9,17.15 C6.2 ; v1(13.259,12.675) 14.935,12.675 15.392,12.217 15.392,9.848 16.547,8.694 17.562,8.694 19.145,7.112 P2.2 19.609,7.239 20.396,7.239 C3.2 ; P5.2 14.714,28.372 15.063,28.022 15.118,28.022 17.9,25.241 ; v1(16.75,23.25) 16.8,23.25 C5.2@17.9,24.35 ; C5.2 17.9,25.241 ; C3.2@21.547,8.527 22.405,9.385 C4.2 22.654,9.42 22.654,9.806 22.488,9.972 22.488,10.888 21.75,11.626 ; 26.539,21.95 26.539,22.768 25.355,23.952 23.883,23.952 23.31,24.524 23.046,24.524 22.157,25.413 C8.2 22.111,25.452 20.741,26.822 19.482,26.822 17.9,25.241
pads on no net: U1.1 U1.2 U1.3 U1.4 U1.26 U1.27 U1.45 U1.46

## Polygon pours and split planes (outlines as drawn)
GND on Top Layer "GNDTOP" (solid, pour order 0): 0,0 0,37.5 37.5,37.5 37.5,-0.25
GND on Bottom Layer "GNDBOTTOM" (solid, pour order 1): 0,0 0,37.5 37.5,37.5 37.5,-0.25

## Keep-outs
Keep-Out Layer:
  the board outline again, w0.3

## Silkscreen, mask and mechanical layers (free items; w line width, h text height)
Top Overlay:
  drawing of 32 lines, arcs and shapes, not listed
  text "p" at 33.249,33.064 h4
  text "R" at 1.5,32.954 h5
  text "VBAT" at 11.768,30.157 h0.81
  text "GND" at 15.552,30.107 h0.81
  text "SDA" at 23.63,30.107 h0.81
  text "W" at 0.991,30.074 h4
  text "GND" at 18.346,30.081 h0.81
  text "SCL" at 21.039,30.081 h0.81
  text "GND" at 7.805,22.029 h0.81
  text "SWCLK" at 7.272,12.53 h0.81
  text "SWDIO" at 7.348,11.234 h0.81
  text "E" at 22.835,9.449 h5
  text "-" at 14.638,8.417 h0.81
  text "+" at 20.607,6.832 h0.81
  text "C" at 33.5,1.5 h4
  text "G" at 4.472,0.874 h2
Bottom Overlay:
  text "JLCJLCJLCJLC" at 24.707,33.434 h0.81
  text "SIDOWSKY" at 4.145,19.169 h0.81 r90
  text "SIDOWSKY" at 33.701,18.829 h0.81 r270
  text "R" at 15.192,10.401 h0.81
  text "S" at 21.858,10.155 h0.81
  text "VCC" at 11.016,4.199 h0.81
  text "GND" at 16.883,4.173 h0.81
  text "VCC" at 22.421,3.919 h0.81
Mechanical 1:
  lines w0.254: 37.5,2.498 37.5,35 37.5,35 ; 37.5,2.5 cw(c35,2.5) 35,0 2.5,0 cw(c2.5,2.5) 0,2.5 0,35 cw(c2.5,35) 2.5,37.5 35,37.5 cw(c35,35) 37.5,35 ; 27.5,27.5 cw(c27.5,25) 30,25 30,10 ; 27.5,27.5 ccw(c27.5,27.5) 27.5,27.5 ; 27.5,27.5 12.5,27.5 ccw(c12.5,25) 10,25 10,10 ccw(c12.5,10) 12.5,7.5 27.5,7.5 ccw(c27.5,10) 30,10 ; 30,10 ccw(c30,10) 30,10 ; 37.5,35 ccw(c37.5,35) 37.5,35